# Altium PCB Copy of main - shifted.PcbDoc (part 15 of 15)
Units mil, origin at the board's own origin, x right, y up, seen from the top; angles counter-clockwise.
Board outline 8394.55 x 5164.44 mil, 7 copper layers (Top Layer 1, Layer 2, Layer 3, Unused, Layer 4_pow, Layer 5_gnd, Bottom 6+gnd), stack 46.112 mil thick; 363 components, 409 nets, 1750 pads, 991 vias.
Unrouted connection lines stored in the file: 111.
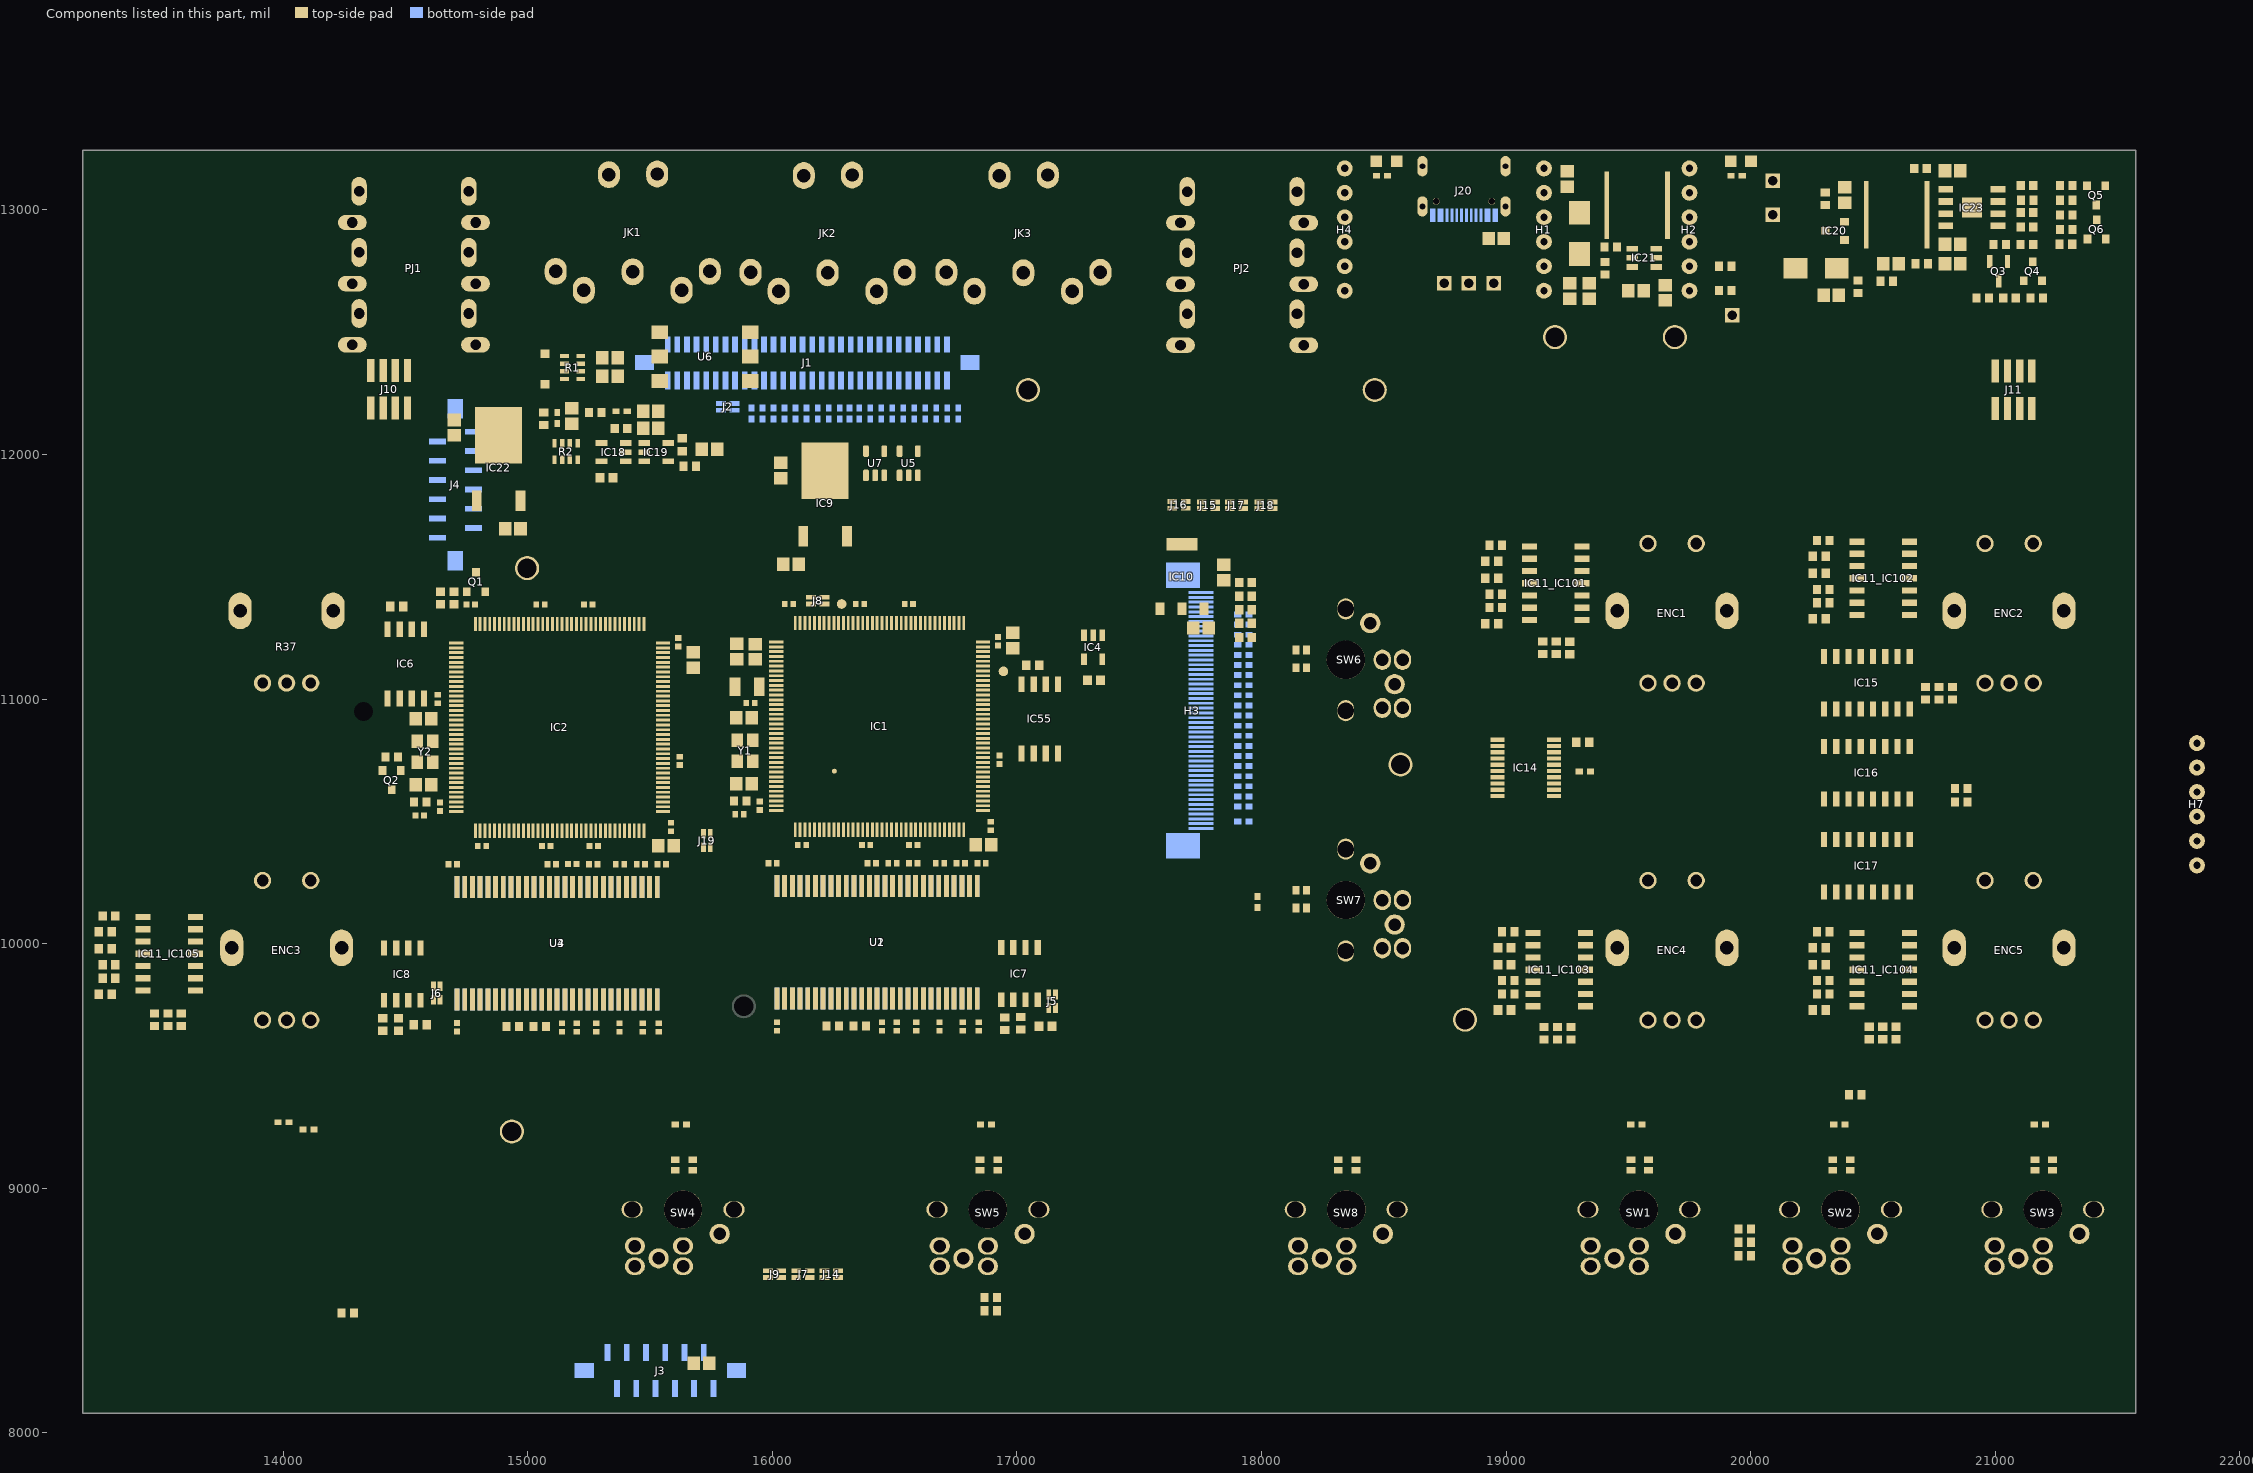
[diagram p18: the components of this part, seen from the top]

## Polygon pours and split planes (outlines as drawn) (continued)
no net on Layer 3 "NONET_L03_P012" (solid, remove dead copper, pour order 12): 16580,10860 16655,10860 16655,10747.12 16640.88,10732.99 16640.88,10718.95 16594.29,10718.95 16580,10733.23 16580,10750
no net on Layer 3 "NONET_L03_P013" (solid, remove dead copper, pour order 13): 16810,10940 16830.1,10919.9 16830.1,10764.74 16798.36,10732.99 16798.36,10710 16758.8,10711.29 16766.45,10741.02 16766.45,10896.45
V_USB on Layer 3 "NONET_L01_P-001" (solid, remove dead copper, pour order 63): 19930,12820 20409.02,12820 20409.02,12940 20025.71,12942.22 19753.78,13244.04 19700.92,13244.04 19700.92,12917.7 19799.74,12920.77
no net on Layer 3 "NONET_L03_P014" (solid, remove dead copper, pour order 14): 16858.98,10405 16908.98,10405 16908.98,10359.12 16908.22,10358.37 16908.22,10165.76 16908.98,10165 16843.98,10165 16843.98,10357.12 16861.09,10374.23 16858.98,10376.35
no net on Layer 3 "NONET_L03_P015" (solid, remove dead copper, pour order 15): 16672.11,10390.53 16670,10405 16720,10405 16720,10359.12 16719.24,10358.37 16719.24,10165.76 16720,10165 16655,10165 16655,10357.12 16672.11,10374.23 16670,10376.35
no net on Layer 3 "NONET_L03_P018" (solid, remove dead copper, pour order 18): 15363.81,10386.34 15361.7,10400.81 15411.7,10400.81 15411.7,10354.93 15410.94,10354.18 15410.94,10161.57 15411.7,10160.81 15346.7,10160.81 15346.7,10352.93 15363.81,10370.04 15361.7,10372.16
no net on Layer 3 "NONET_L03_P019" (solid, remove dead copper, pour order 19): 15550.68,10400.81 15600.68,10400.81 15600.68,10354.93 15599.92,10354.18 15599.92,10161.57 15600.68,10160.81 15535.68,10160.81 15535.68,10352.93 15552.79,10370.04 15550.68,10372.16
no net on Layer 3 "NONET_L03_P020" (solid, remove dead copper, pour order 20): 15271.7,10855.81 15346.7,10855.81 15346.7,10742.93 15332.58,10728.8 15332.58,10714.76 15285.99,10714.76 15271.7,10729.04 15271.7,10745.81
GND on Layer 3 "GND_L03_P021" (solid, remove dead copper, pour order 21): 15501.7,10935.81 15521.8,10915.71 15521.8,10760.55 15490.06,10728.8 15490.06,10705.81 15450.5,10707.1 15458.15,10736.83 15458.15,10892.26
GND on Top Layer 1 "NONET_L01_P-001" (solid, remove dead copper, pour order 23): 16007.09,11422.2 17411.5,11424.28 17411.5,9612.2 16007.09,9612.2
GND on Top Layer 1 "NONET_L01_P-001" (solid, remove dead copper, pour order 22): 15933.33,9610.26 14566.25,9610.26 14566.25,11423.25 15928.33,11425.26 15928.33,9615.26
NetD3_1 on Top Layer 1 "NETD3_1_L01_P057" (solid, remove dead copper, pour order 57): 19338.3,12940 19419.81,12940 19419.81,13040 19325.8,13040
+V_SYS on Top Layer 1 "+V_SYS_L01_P069" (solid, pour order 69): 20345.91,13045.28 20350.63,13050 20350.63,13125.04 20335.67,13140 20240.63,13140 20150.63,13050 20020.63,13050 19920.64,13149.99 19830.44,13149.99 19830.44,13059.81 19758.25,12987.62 19758.25,12879.74 20180.37,12879.74 20250.63,12950 20250.63,13020.47 20275.43,13045.28
V_BAT on Top Layer 1 "V_BAT_L01_P070" (solid, remove dead copper, pour order 70): 20030.63,13070 20140.63,13070 20230.63,13160 20380.21,13160 20401.41,13138.8 20384.02,13121.4 20384.02,12976.61 20410.63,12950 20410.63,12920 20540.63,12850 20472.01,12987.78 20540.37,13090 20540.63,13200 20500.63,13240 20050.63,13240 20010.63,13200 20010.63,13090
NetC92_2 on Top Layer 1 "NONET_L01_P-001" (solid, remove dead copper, pour order 65): 20259.8,12872.67 20135.41,12804.67 20279.8,12670 20323.7,12667.77 20323.24,12693.14 20316.1,12696.94 20279.8,12697.24 20279.8,12812.03 20279.8,12830.11 20319.8,12830.11 20319.8,13030.11 20269.8,13030.11 20259.8,13020.11
+V_SYS on Top Layer 1 "NONET_L01_P-001" (solid, remove dead copper, pour order 54): 19922.36,12999.99 19935.93,13013.56 19935.93,13083.88 19869.81,13149.99 19674.81,13149.99 19674.81,12805.87 19795.87,12805.87 19890,12900 19890,12999.99
+V_SYS on Top Layer 1 "+V_SYS_L01_P055" (solid, remove dead copper, pour order 55): 19545.6,12647.54 19701.22,12653.11 19701.22,12878.78 19675.6,12904.4 19585.6,12904.4 19565.6,12884.4 19565.6,12704.4 19545.6,12684.4
+5V on Top Layer 1 "+5V_L01_P056" (solid, remove dead copper, pour order 56): 19195.6,12714.21 19235.4,12674.4 19375.6,12674.4 19375.6,12884.4 19365.6,12894.4 19305.6,12894.4 19265.6,12934.4 19265.6,13119.99 19195.6,13119.99
GND on Top Layer 1 "GND_L01_P058" (solid, remove dead copper, pour order 58): 19399.81,12719.99 19435.01,12762.85 19435.01,12884.4 19545.6,12884.4 19545.6,12724.4 19484.02,12639.99 19428.84,12639.99 19383.74,12700.43
+5V on Layer 2 "+5V_L02_P030" (solid, pour order 30): 13180,13250 13180,8080 21575,8080 21580,8085 21575,8090 21575,13245
+MCU on Layer 2 "NONET_L01_P-001" (solid, remove dead copper, pour order 24): 16009.17,11423.82 17405,11423.82 17405,9612.8 16009.17,9612.8
+MCU on Layer 2 "NONET_L01_P-001" (solid, remove dead copper, pour order 25): 15931.25,11421.87 14566.25,11421.87 14566.25,9610.85 15931.25,9610.85
GND on Layer 2 "NONET_L01_P-001" (solid, remove dead copper, pour order 64): 20259.65,12560 20259.65,13240 21479.65,13240 21479.65,12560
GND on Bottom 6+gnd "GND_L07_P071" (solid, remove dead copper, pour order 71): 13175,13240 13180,13235 13180,8080 21575,8080 21575,13245
GND on Bottom 6+gnd "GND_L07_P029" (solid, remove dead copper, pour order 29): 16011.74,11974.96 17405,11974.96 17405,10163.93 16011.74,10163.93
GND on Bottom 6+gnd "GND_L07_P017" (solid, remove dead copper, pour order 17): 15933.81,11973.01 14566.25,11973.01 14566.25,10161.99 15933.81,10161.99
+5V_Out on Bottom 6+gnd "NONET_L02_P-001" (solid, remove dead copper, pour order 16): 15765,12140 15867.64,12140 15893.35,12165.71 15893.35,12203.35 15945,12255 15945,12515 15940,12520 15765,12520 15750,12505 15750,12150
GND on Layer 5_gnd "GND_L06_P033" (solid, pour order 33): 13180,13250 13170,13240 13170,8075 21570,8075 21575,8080 21575,13245

## Silkscreen, mask and mechanical layers (free items; w line width, h text height)
Top Overlay:
  circle w10: c19690,12480 r88.03
  circle w10: c19200,12480 r88.03
  lines w5: 19700.2,12639.13 19700.2,12780.86 ; 20110.04,12689.13 20110.04,12830.87 ; 20968.43,12886.93 20934.65,12835 20934.65,12735 20874.65,12670 20874.65,12595 21229.65,12595 21229.65,12775 21229.65,12835 21179.61,12886.93
  lines w10: 14013.78,9913.19 14013.78,9982.6 ; 15983.15,8708.82 15983.15,8738.82 16153.15,8738.82 ; 16038.15,8588.82 16038.15,8573.82 16098.15,8573.82 16098.15,8588.82 ; 16268.15,8713.82 16268.15,8738.82 16213.15,8738.82 ; 17408.15,11648.82 17493.15,11648.82 17493.15,11688.82 17618.15,11688.82 17738.15,11688.82 17848.15,11688.82 ; 17605,11728.82 17635,11728.82 ; 17635,11748.82 17635,11728.82 ; 17690,11688.82 17690,11748.82 ; 17755,11748.82 17755,11728.82 ; 17815,11688.82 17815,11748.82 ; 17925,11693.82 17925,11748.82 ; 17990,11748.82 17990,11728.82 17870,11728.82 ; 18045,11688.82 18045,11743.82 ; 16153.15,8738.82 16213.15,8738.82 ; 16153.15,8738.82 16153.15,8713.82 16153.15,8738.82 ; 16213.15,8738.82 16213.15,8713.82 16213.15,8738.82 ; 17635,11728.82 17755,11728.82 ; 17755,11728.82 17870,11728.82 ; 17870,11728.82 17870,11748.82 17870,11728.82
  text "SWD" at 17590,11698.82 h24 r90
  text "ADC" at 17398.15,11608.82 h24 r90
  text "SPI" at 16088.15,8753.82 h24
  text "I2C" at 16038.15,8533.82 h24
Bottom Overlay:
  lines w10: 18279.81,12380 18279.81,13239.99 19829.81,13239.99 19829.81,12380 18279.81,12380
Board Shape:
  lines w10: 13180.25,8079.59 13180.25,8670.67 13180.25,13244.04 21496.06,13244.04 21496.06,8749.41 21496.06,8079.59 13180.25,8079.59 ; 18274.81,12549.99 19824.81,12549.99 19824.81,13244.99 18274.81,13244.99 18274.81,12549.99
Outline:
  circle w10: c14013.78,11360.55 r59.06
  circle w10: c18344.49,11160.81 r59.06
  circle w10: c18344.49,10178.22 r59.06
  circle w10: c14013.78,9982.6 r59.06
  circle w10: c15634.53,8913.12 r59.06
  circle w10: c16881.21,8913.12 r59.06
  circle w0.5: c14210.88,12441.31 r19.68
  circle w0.5: c14210.88,12086.98 r19.68
  circle w0.5: c14683.32,12441.31 r19.68
  circle w0.5: c14683.32,12086.98 r19.68
  circle w0.5: c15155.76,12441.31 r19.68
  circle w0.5: c15155.76,12086.98 r19.68
  circle w0.5: c15628.2,12441.31 r19.68
  circle w0.5: c15628.2,12086.98 r19.68
  circle w0.5: c16100.64,12441.31 r19.68
  circle w0.5: c16100.64,12086.98 r19.68
  circle w0.5: c16573.08,12441.31 r19.68
  circle w0.5: c16573.08,12086.98 r19.68
  circle w0.5: c17045.52,12441.31 r19.68
  circle w0.5: c17045.52,12086.98 r19.68
  circle w0.5: c17517.96,12441.31 r19.68
  circle w0.5: c17517.96,12086.98 r19.68
  circle w0.5: c17990.4,12441.31 r19.68
  circle w0.5: c17990.4,12086.98 r19.68
  circle w0.5: c18462.85,12441.31 r19.68
  circle w0.5: c18462.85,12086.98 r19.68
  circle w0.5: c18935.29,12441.31 r19.68
  circle w0.5: c18935.29,12086.98 r19.68
  circle w0.5: c19407.73,12441.31 r19.68
  circle w0.5: c19407.73,12086.98 r19.68
  circle w0.5: c19880.17,12441.31 r19.68
  circle w0.5: c19880.17,12086.98 r19.68
  circle w0.5: c20352.61,12441.31 r19.68
  circle w0.5: c20352.61,12086.98 r19.68
  circle w0.5: c20825.05,12441.31 r19.68
  circle w0.5: c20825.05,12086.98 r19.68
  circle w0.5: c21297.49,12441.31 r19.68
  circle w0.5: c21297.49,12086.98 r19.68
  circle w10: c21194.5,8913.12 r59.06
  circle w10: c20367.72,8913.12 r59.06
  circle w10: c19542.61,8913.12 r59.06
  circle w10: c21056.7,11360.55 r59.06
  circle w10: c21056.7,9982.6 r59.06
  circle w10: c19678.75,9982.6 r59.06
  circle w10: c19678.75,11360.55 r59.06
  lines w10: 13180.25,8670.67 13180.25,13244.04 21574.8,13244.04 21574.8,8670.67 ; 13180.25,8670.67 13180.25,8079.59 21574.8,8079.59 21574.8,8670.67 ; 13180.25,8670.67 21574.8,8670.67 ; 18935.29,12086.98 18935.29,12086.98

## Text inside footprints (layer, text, board x,y; h text height)
H3: Bottom Overlay "1" at 17833.57,10466.71 h25 r270; Bottom Overlay "5" at 17833.57,10545.45 h25 r270; Bottom Overlay "10" at 17833.57,10643.87 h25 r270; Bottom Overlay "15" at 17833.57,10742.3 h25 r270; Bottom Overlay "20" at 17833.57,10840.73 h25 r270; Bottom Overlay "25" at 17833.57,10939.15 h25 r270; Bottom Overlay "30" at 17833.57,11037.58 h25 r270; Bottom Overlay "35" at 17833.57,11136 h25 r270; Bottom Overlay "40" at 17833.57,11234.43 h25 r270; Bottom Overlay "45" at 17833.57,11332.85 h25 r270; Bottom Overlay "50" at 17833.57,11431.28 h25 r270